# Altium PCB PCB1.PcbDoc
Units mm, origin at the board's own origin, x right, y up, seen from the top; angles counter-clockwise.
Board outline 28.96 x 34.54 mm, 2 copper layers (Top Layer, Bottom Layer); 5 components, 11 nets, 31 pads, 4 vias.
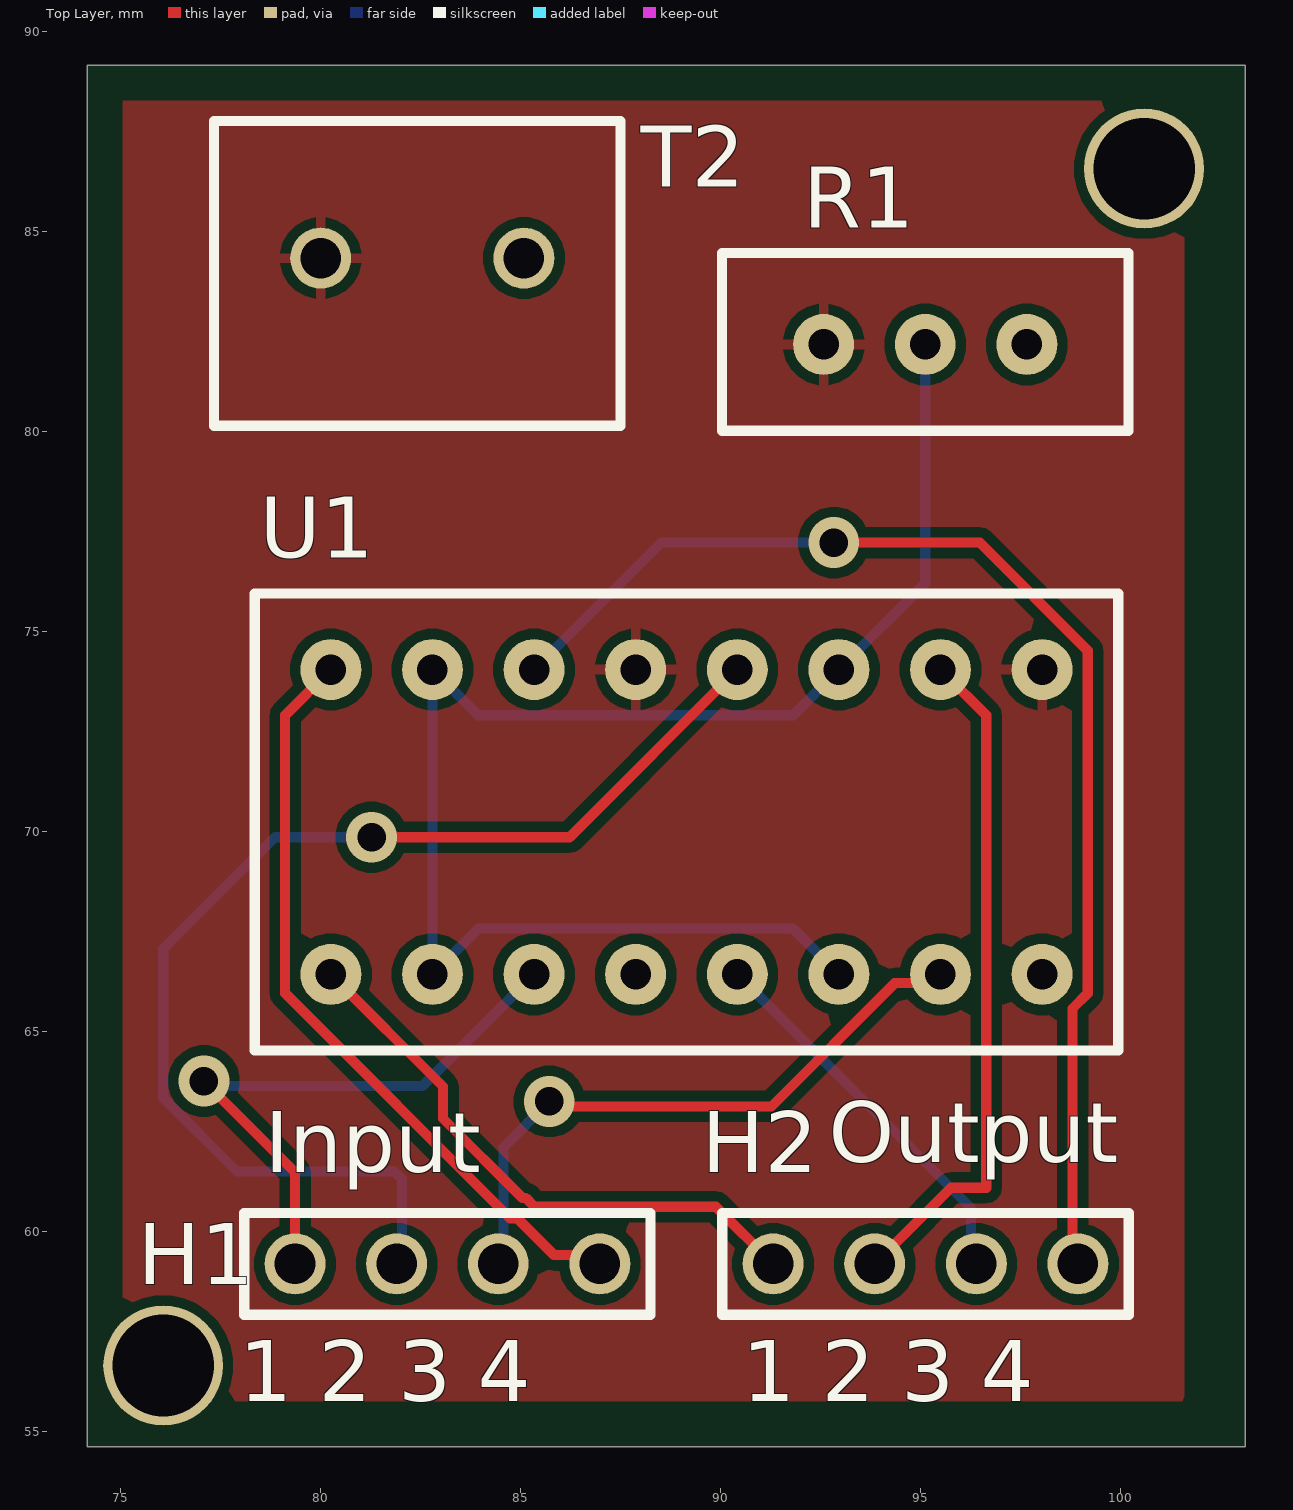
[diagram p0: Top Layer view]
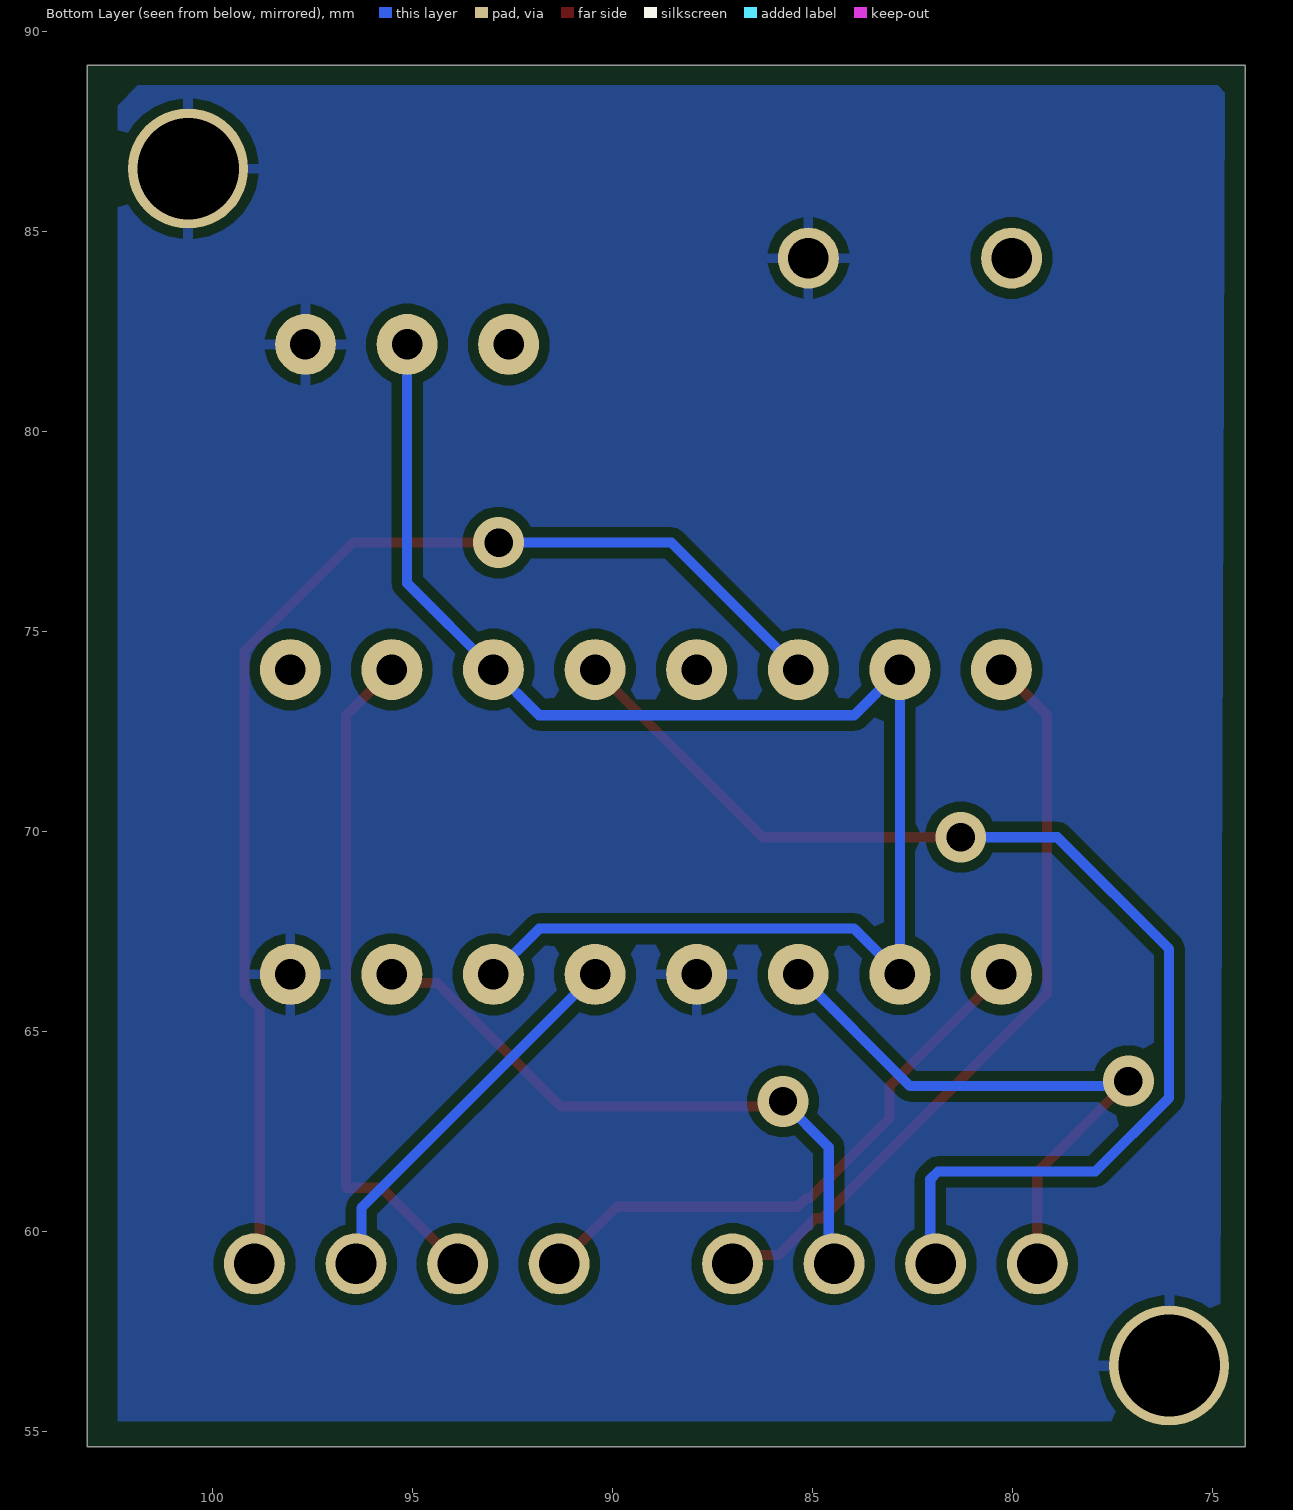
[diagram p1: Bottom Layer view, seen from below]

## Layer stack, top to bottom
Top Solder: solder mask 0.0102, Solder Resist, Dk 3.5
Top Layer: signal copper 0.0356
Dielectric 1: dielectric 0.32, FR-4, Dk 4.8
Bottom Layer: signal copper 0.0356
Bottom Solder: solder mask 0.0102, Solder Resist, Dk 3.5

## Board outline
74.168,54.61 74.168,89.154 103.124,89.154 103.124,54.61

## Design rules (kind name [scope] priority, off if disabled: settings)
Clearance [All] p1: gap=0.254 ignorepadtopadclearanceinfootprint=FALSE
PolygonConnect [All] p1: connectstyle=Relief reliefconductorwidth=0.254 reliefentries=4 polygonreliefangle="90 Angle" airgapwidth=0.254
RoutingVias [All] p1: holewidth=0.711 width=1.27 viastyle="Through Hole" minholewidth=0.711 minwidth=1.27 maxholewidth=0.711 maxwidth=1.27
SolderMaskExpansion [All] p1: expansion=0.102 istentingtop=FALSE
Width [All] p1: maxlimit=0.254 minlimit=0.254 preferedwidth=0.254
30 further rules are at their usual default settings.

## Components (designator, comment, footprint, x,y, rotation, side; value= is the part's Value field where it differs from the comment)
H1 "header out" headers 79.368,59.182 r0 top
H2 "header in" headers 91.32,59.182 r0 top
R1 "pot" pot 92.583,82.169 r0 top
T2 "Terminal" Terminal 80.01,84.328 r0 top
U1 "quad omamp 2*lm393" "quad omamp 2*lm393" 80.264,66.421 r0 top

## Footprints (in the part's own frame and the unit in brackets; to place one, negate y for a bottom-side part, rotate by r counter-clockwise, add the part's x,y. Pads: shape width x height; smd on the part's side, far side on the other; paste and mask are expansions set on the pad)
headers [mil]
  round 60 hole 40: 1(0,0) 2(100,0) 3(200,0) 4(300,0)
  silkscreen extent -50,-50 350,50
pot [mil]
  round 60 hole 30: +(0,0) -(200,0) OUT(100,0)
  silkscreen extent -100,-85 300,90
"quad omamp 2*lm393" [mil]
  round 60 hole 30: 1+(200,0) 1-(100,0) 1OUT(0,0) 2+(400,300) 2-(500,300) 2OUT(600,300) 3+(600,0) 3-(500,0) 3OUT(400,0) 4+(0,300) 4-(100,300) 4OUT(200,300) GND(300,0) GND(700,0) Vcc(300,300) Vcc(700,300)
  silkscreen extent -75,-75 775,375
Terminal [mil]
  round 60 hole 40: +(0,0) -(200,0)
  silkscreen extent -105,-165 295,135

## Free pads (board coordinates)
  round 3 hole 2.54: 2(100.595,86.563) 3(76.073,56.642)

## Via types
v1: diameter 1.27, hole 0.711, Top Layer to Bottom Layer, 4 vias

## Nets (pads, with @x,y where several pads share a name; then routed paths per layer and width w, separated by ;. In a path a pad name is that pad's centre, name@x,y a point inside that pad or via, vN(x,y) a via of type N, cw(c..) or ccw(c..) an arc to the next point about the centre after c; other vN are vias at no path point)
1IN: H1.1 U1.1+ | length 15
  Top Layer w0.254: v1(77.089,63.754) 79.368,61.475 H1.1
  Bottom Layer w0.254: v1(77.089,63.754) 77.216,63.627 82.55,63.627 U1.1+
1OUT: H2.1 U1.1OUT | length 14.5
  Top Layer w0.254: U1.1OUT 83.067,63.618 83.067,62.817 85.05,60.833 85.132,60.833 85.352,60.613 89.889,60.613 H2.1
2IN: H1.2 U1.2+ | length 30
  Top Layer w0.254: v1(81.28,69.85) 86.233,69.85 U1.2+
  Bottom Layer w0.254: v1(81.28,69.85) 78.867,69.85 76.073,67.056 76.073,63.333 77.915,61.491 81.851,61.491 82.042,61.301 82.042,59.316 H1.2
2OUT: H2.2 U1.2OUT | length 17.1
  Top Layer w0.254: H2.2 95.765,61.087 96.647,61.087 96.647,72.898 95.631,73.914 95.631,74.041 U1.2OUT
3IN: H1.3 U1.3+ | length 15.8
  Top Layer w0.254: v1(85.725,63.246) 85.852,63.119 91.278,63.119 94.361,66.202 95.285,66.202 U1.3+
  Bottom Layer w0.254: H1.3 84.582,59.316 84.582,62.103 v1(85.725,63.246)
3OUT: H2.3 U1.3OUT | length 9.7
  Bottom Layer w0.254: U1.3OUT 96.266,60.579 96.266,59.316 H2.3
3v3: R1.+ T2.+ U1.Vcc
4IN: H1.4 U1.4+ | length 19.2
  Top Layer w0.254: U1.4+ 79.121,72.898 79.121,65.948 84.744,60.325 84.922,60.325 85.845,59.401 86.769,59.401 H1.4
4OUT: H2.4 U1.4OUT | length 31.8
  Top Layer w0.254: v1(92.837,77.216) 96.485,77.216 99.187,74.514 99.187,65.948 98.806,65.567 98.806,59.316 H2.4
  Bottom Layer w0.254: U1.4OUT 88.519,77.216 v1(92.837,77.216)
GND: pad.2 pad.3 R1.- T2.- U1.GND
Vref: R1.OUT U1.1- U1.2- U1.3- U1.4- | length 38.9
  Bottom Layer w0.254: U1.3- 91.821,67.564 83.947,67.564 U1.1- U1.4- 83.947,72.898 91.821,72.898 U1.2- 95.123,76.2 R1.OUT

## Polygon pours and split planes (outlines as drawn)
GND on Bottom Layer "GND_L02_P000" (solid, pour order 0): 74.676,88.646 101.854,88.646 102.362,88.138 102.362,55.245 75.946,55.245 74.803,56.388
3v3 on Top Layer "3V3_L01_P001" (solid, pour order 1): 75.057,88.265 101.6,88.265 101.6,55.88 101.727,55.753 75.819,55.753 75.057,56.515

## Silkscreen, mask and mechanical layers (free items; w line width, h text height)
Top Overlay:
  text "Output" at 92.71,61.722 h1.52
  text "Input" at 78.613,61.468 h1.52
  text "1 2 3 4" at 77.978,55.753 h1.52
  text "1 2 3 4" at 90.551,55.753 h1.52
Mechanical 1:
  the board outline again, w0.254